# EAGLE board Large Mosfet (EAGLE 6.4)
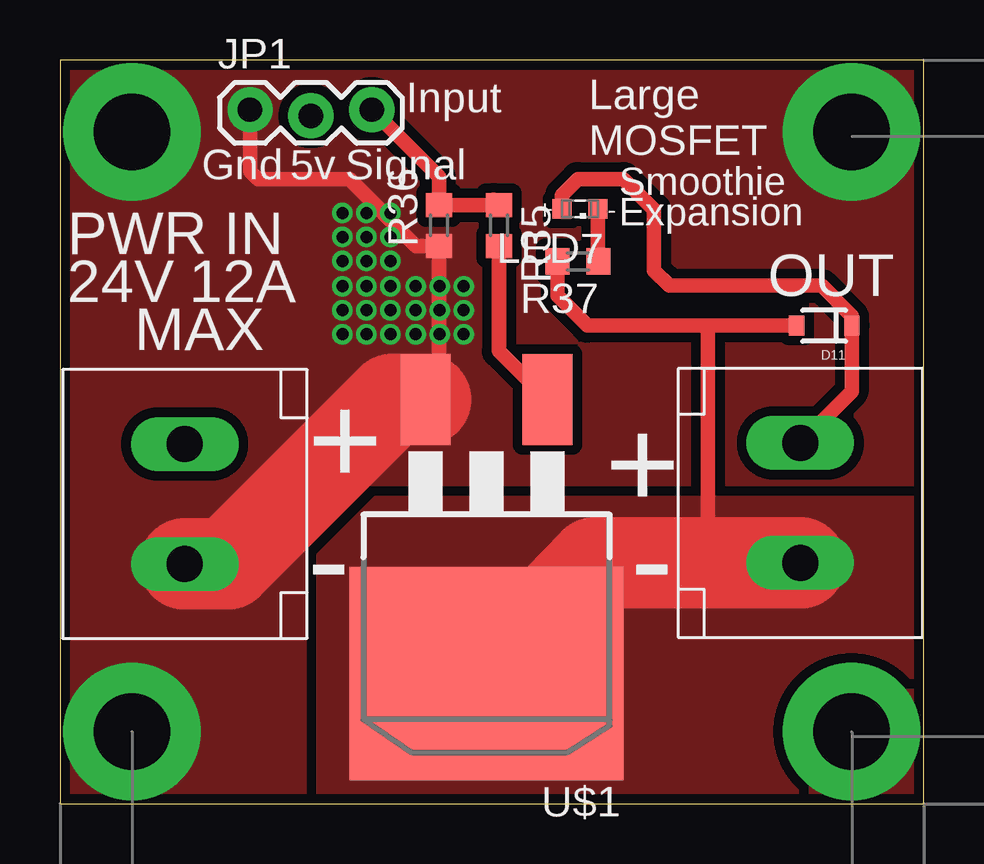
[diagram p0: board, top side]
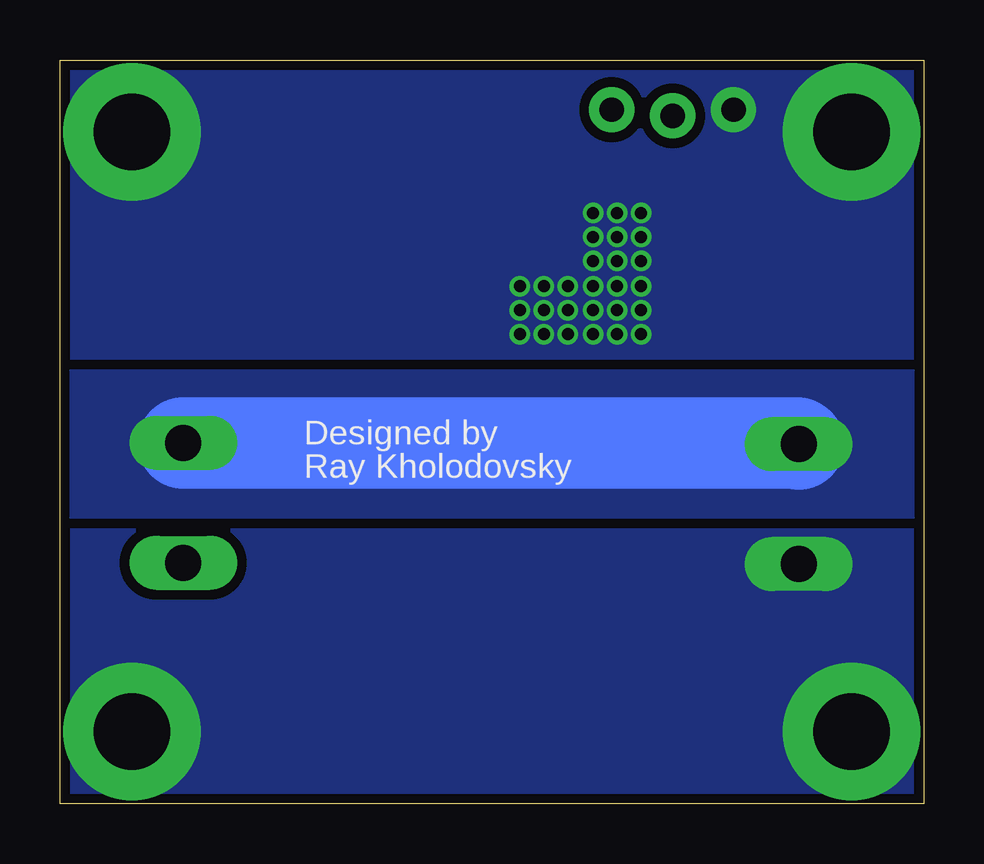
[diagram p1: board, bottom side, seen from below]

Size 36 x 31 mm. Coordinates in mm from the lower left corner, seen from the top.
Outline: 0,0 36,0 36,31 0,31 0,0
Copper layers (1*16): Top 0.0356mm / dielectric 1.5011mm / Bottom 0.0356mm
Design rules "LaenPCBOrder": minimum track width 6mil, minimum drill 13mil, track to track 6mil, track to pad 6mil, pad to pad 6mil, via to via 6mil, smd to smd 6mil, copper to edge 15mil, drill to drill 6mil, minimum pad ring 7mil, minimum via ring 7mil, stop-mask expansion 3mil, vias tented up to drill 0mil, thermal gap 10mil
Net classes: 5 3.3-Amp Class: width 1.27 mm

## Footprints (pad centres in the part's own frame; a part is rotated, then mirrored left to right if it is on the bottom)
SOD-323 = smd 0.63 x 0.83: A 1.15,0; C -1.15,0
1X03_LOCK = drill 1.016 pad 1.88: 1 0,0.127; 2 2.54,-0.127; 3 5.08,0.127
SML0603 = smd 0.8 x 0.8: A 0.75,0; C -0.75,0
R0603 = smd 1 x 1.1: 1 -0.85,0; 2 0.85,0
D2PACK = smd 2.083 x 3.81: 1 -2.54,-8.89; 3 2.54,-8.89 | smd 11.43 x 8.89: 2 0,2.54
1715250000 = drill 1.5 long: P$1 0,0; P$2 5,0

## Placement (x,y rotation side)
D11  1N4148  [SOD-323]  31.86,19.92 180 top
JP1  [1X03_LOCK]  7.92,28.8 0 top
LED7  LED  [SML0603]  21.68,24.79 180 top
R35  10r  [R0603]  18.3,24.1 270 top
R36  100k  [R0603]  15.8,24.1 90 top
R37  1.5k  [R0603]  21.59,22.6 180 top
U$1  MOSFET  [D2PACK]  17.78,7.95 180 top
U$2  5MMCONN  [1715250000]  30.86,10.03 90 top
U$6  5MMCONN  [1715250000]  5.21,14.99 270 top

## Library data of the parts
D11 = SparkFun-DiscreteSemi; PROD_ID: DIO-09646
JP1 = SparkFun-Connectors
LED7 = led
R35-R37 = resistor
U$1 = Cohesion_parts
U$2 U$6 = eric_sorensen

## Nets
E1-CONTROL [3.3-Amp Class]: D11.A R37.2 U$1.2 U$2.P$1
FET-LOGIC-IN: JP1.3 R35.1 R36.2
GND: JP1.1 R36.1 U$1.3 U$6.P$2
HEATERVIN: D11.C LED7.A U$2.P$2 U$6.P$1
N$28: R35.2 U$1.1
N$30: LED7.C R37.1
VCC: JP1.2

## Tracks (layer width: path | path; a pad name or v marks a point on that pad's centre or on a via)
E1-CONTROL
  Top 0.61: R37.2 20.74,21.17 21.99,19.92 27.01,19.92 | D11.A 27.01,19.92 | 27.01,19.92 27.01,10.33 27.3,10.03
  Top 3.81: U$2.P$1 27.3,10.03 22.27,10.03 U$1.2
  pour Top (isolate 0.406, no thermals): 36.2,12.7 10.79,12.7 10.79,0 36.2,0
FET-LOGIC-IN
  Top 0.61: 18.08,25.17 R35.1 R36.2 15.8,26.13 JP1.3
GND  (via drill 0.5, 3.2 pad 5.71)
  Top 0.61: U$1.3 15.8,17.4 R36.1 14.85,23.25 12.06,26.04 8.26,26.04 7.92,26.37 JP1.1
  Top 3.81: U$6.P$2 6.99,9.99 13.84,16.84 U$1.3
  other vias: 3,3 33,3 33,28 3,28 14.83,19.57 15.83,19.57 16.83,19.57 16.83,20.57 15.83,20.57 14.83,20.57 14.83,21.57 15.83,21.57 16.83,21.57 11.78,19.57 12.78,19.57 13.78,19.57 13.78,20.57 12.78,20.57 11.78,20.57 11.78,21.57 12.78,21.57 13.78,21.57 11.78,22.62 12.78,22.62 13.78,22.62 13.78,23.62 12.78,23.62 11.78,23.62 11.78,24.62 12.78,24.62 13.78,24.62
  pour Top (isolate 0.406, rank 5, no thermals): 0,0 36,0 36,31 0,31
  pour Bottom (isolate 0.406, rank 5, no thermals): 0,0 36,0 36,31 0,31
HEATERVIN
  Top 0.61: LED7.A 20.93,25.38 21.59,26.04 23.5,26.04 24.77,24.77 24.77,22.23 25.4,21.59 31.75,21.59 33.01,20.33 D11.C | D11.C 33.04,19.92 | D11.C 33.01,17.18 U$2.P$2
  Bottom 3.81: U$2.P$2 5.25,15.03 U$6.P$1
  pour Bottom (no thermals): 0,12 36,12 36,18 0,18
N$28
  Top 0.61: R35.2 18.3,18.86 U$1.1
N$30
  Top 0.61: LED7.C R37.1

## Text on the board
tPlace: Input | Large | MOSFET | Gnd | 5v | Signal | Smoothie | + | - | Expansion | PWR IN | 24V | 12A | OUT | MAX | + | + | - | -
bPlace: Designed by | Ray Kholodovsky